# EAGLE board nes1_90 (EAGLE 7.7.0)
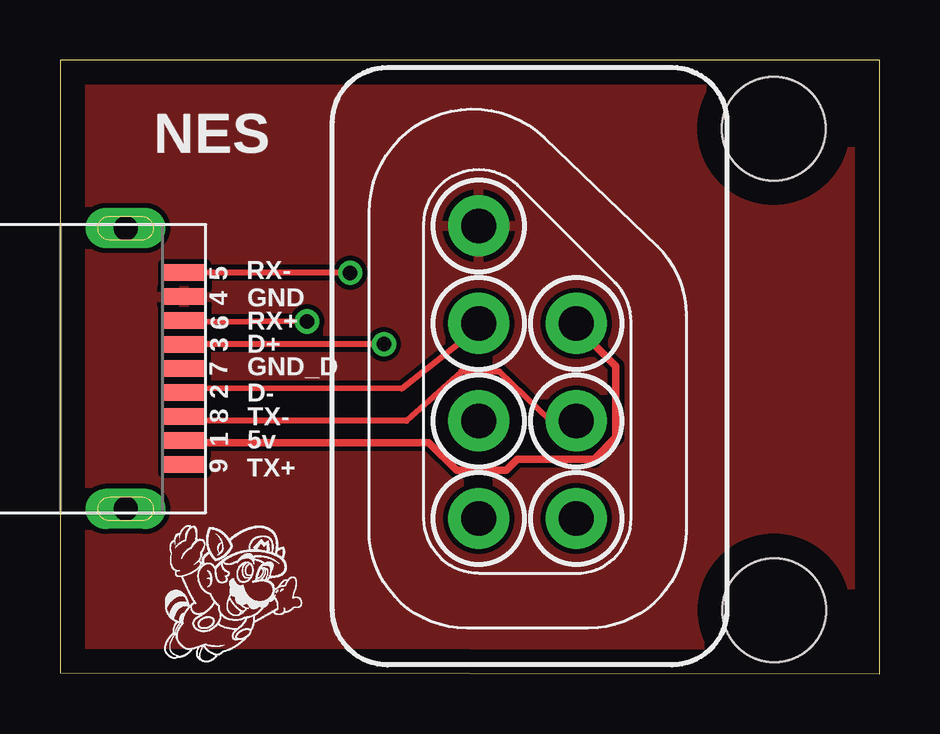
[diagram p0: board, top side]
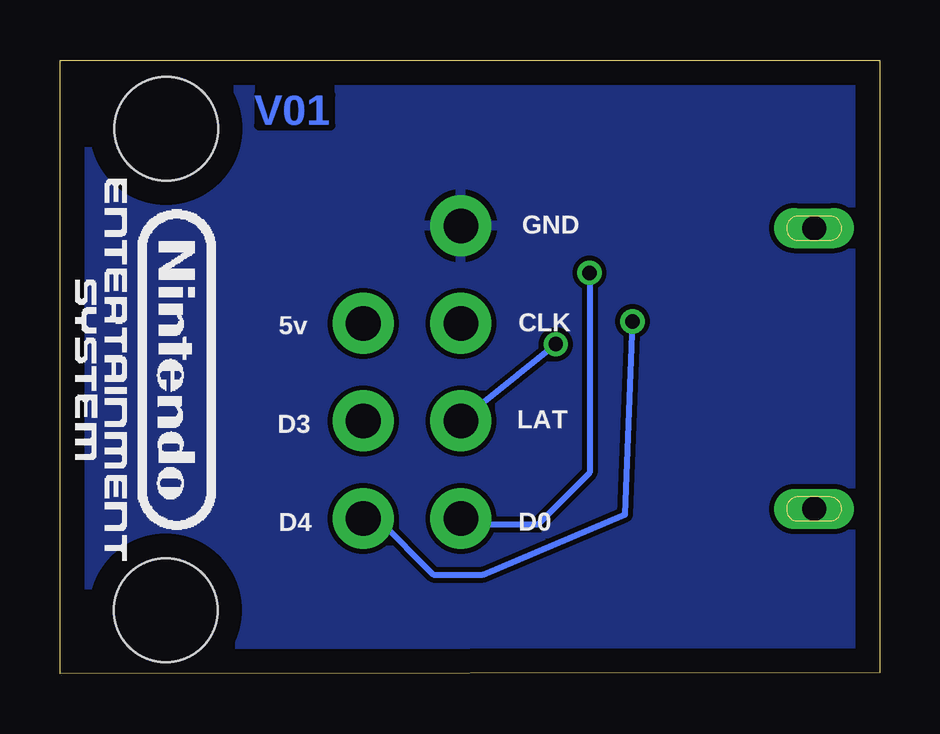
[diagram p1: board, bottom side, seen from below]

Size 34.15 x 25.58 mm. Coordinates in mm from the lower left corner, seen from the top.
Outline: 0,0.05 34.15,0 34.15,25.58 0,25.58 0,0.05
Copper layers (1*16): Top 0.035mm / dielectric 1.5mm / Bottom 0.035mm
Design rules "default": minimum track width 10mil, minimum drill 24mil, track to track 8mil, track to pad 8mil, pad to pad 8mil, via to via 8mil, smd to smd 8mil, copper to edge 40mil, drill to drill 8mil, minimum pad ring 10mil, minimum via ring 8mil, stop-mask expansion 4mil, vias tented up to drill 0mil, thermal gap 10mil
Holes 4.32 mm at 29.74,22.73 29.75,2.66

## Footprints (pad centres in the part's own frame; a part is rotated, then mirrored left to right if it is on the bottom)
692112030100 = smd 0.7 x 1.8: 1 -3,0; 2 -1,0; 3 1,0; 4 3,0; 5 4,0; 6 2,0; 7 0,0; 8 -2,0; 9 -4,0 | drill 1 pad 1.676 long: Z1 5.85,2.45; Z2 -5.85,2.45
NESCONN_NO_TABS = drill 1.448 pad 2.54: 5V 8.128,0; CLOCK 8.128,4.064; D0 0,4.064; D3 4.064,0; D4 0,0; GND 12.192,4.064; LATCH 4.064,4.064

## Placement (x,y rotation side)
K2  692112030100  [692112030100]  5.18,12.73 90 top
U$1  NESCONNNO_TABS  [NESCONN_NO_TABS]  21.51,6.48 90 top

## Library data of the parts
K2 = Wuerth_Elektronik_eiCan_Communication_Connectors_STENCIL
U$1 = gamepad-conn

## Nets
5V: K2.1 U$1.5V
D+: K2.3 U$1.LATCH
D-: K2.2 U$1.CLOCK
GND: K2.4 U$1.GND
GND_D: K2.7
RX+: K2.6 U$1.D4
RX-: K2.5 U$1.D0
TX+: K2.9
TX-: K2.8 U$1.D3

## Tracks (layer width: path | path; a pad name or v marks a point on that pad's centre or on a via)
5V
  Top 0.254: 5.33,9.63 K2.1
  Top 0.305: 5.33,9.63 15.36,9.63 16.54,8.48 18.59,8.48 19.05,8.94 22.25,8.94 23.17,9.86 23.17,12.83 21.56,14.43 U$1.5V
D+  (via drill 0.6)
  Top 0.254: v13.5,13.74 5.33,13.74 K2.3
  Bottom 0.254: v13.5,13.74 U$1.LATCH
D-
  Top 0.254: K2.2 5.33,11.91 14.23,11.89 17.45,14.43 U$1.CLOCK
GND
  pour Bottom: 0.1,25.43 35.29,25.4 35.34,0.15 0.1,0.03
  pour Top: 0.3,25.5 35.18,25.37 35.26,0.13 0.05,0.05
RX+  (via drill 0.61)
  Top 0.254: v10.3,14.69 5.33,14.66 K2.6
  Bottom 0.254: v10.3,14.69 10.61,6.65 16.54,4.14 18.59,4.14 20.88,6.43 21.34,6.43 U$1.D4
RX-  (via drill 0.6)
  Top 0.254: v12.09,16.71 5.33,16.71 K2.5
  Bottom 0.254: v12.09,16.71 12.09,8.39 14.26,6.22 17.19,6.22 U$1.D0
TX-
  Top 0.254: U$1.D3 20.44,10.54 18.32,12.6 16.72,12.6 14.44,10.54 5.33,10.54 K2.8

## Text on the board
Bottom: V01
tPlace: NES | 5 | RX- | 4 | GND | 6 | RX+ | 3 | D+ | 7 | GND_D | 2 | D- | 8 | TX- | 1 | 5v | 9 | TX+
bPlace: GND | CLK | 5v | LAT | D3 | D0 | D4